# Altium PCB TOP LAYER 2.PcbDoc
Units mm, origin at the board's own origin, x right, y up, seen from the top; angles counter-clockwise.
Board outline 152.4 x 101.6 mm, 2 copper layers (Top Layer, Bottom Layer); 4 components, 12 nets, 21 pads, 0 vias.
Unrouted connection lines stored in the file: 6.
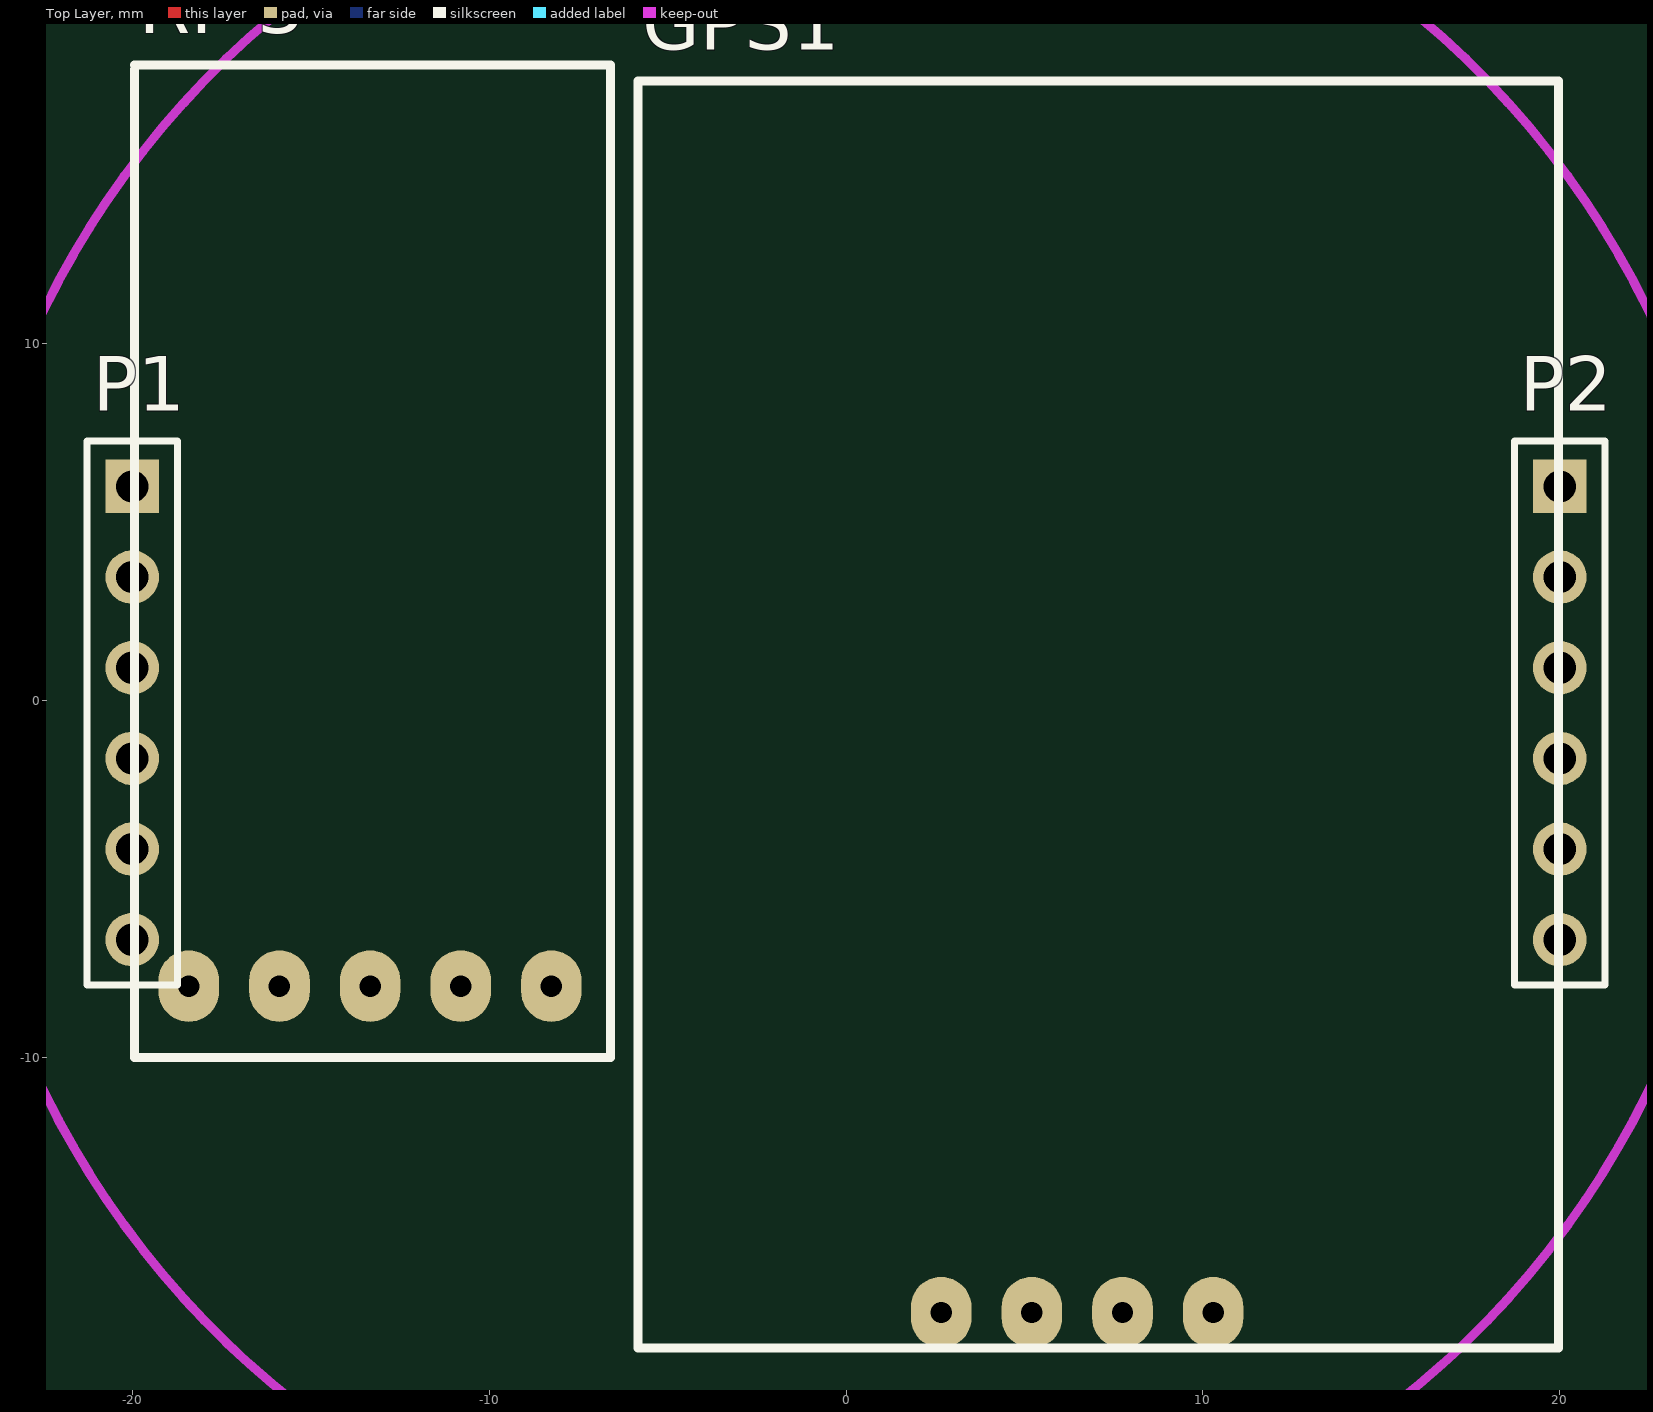
[diagram p0: Top Layer view]
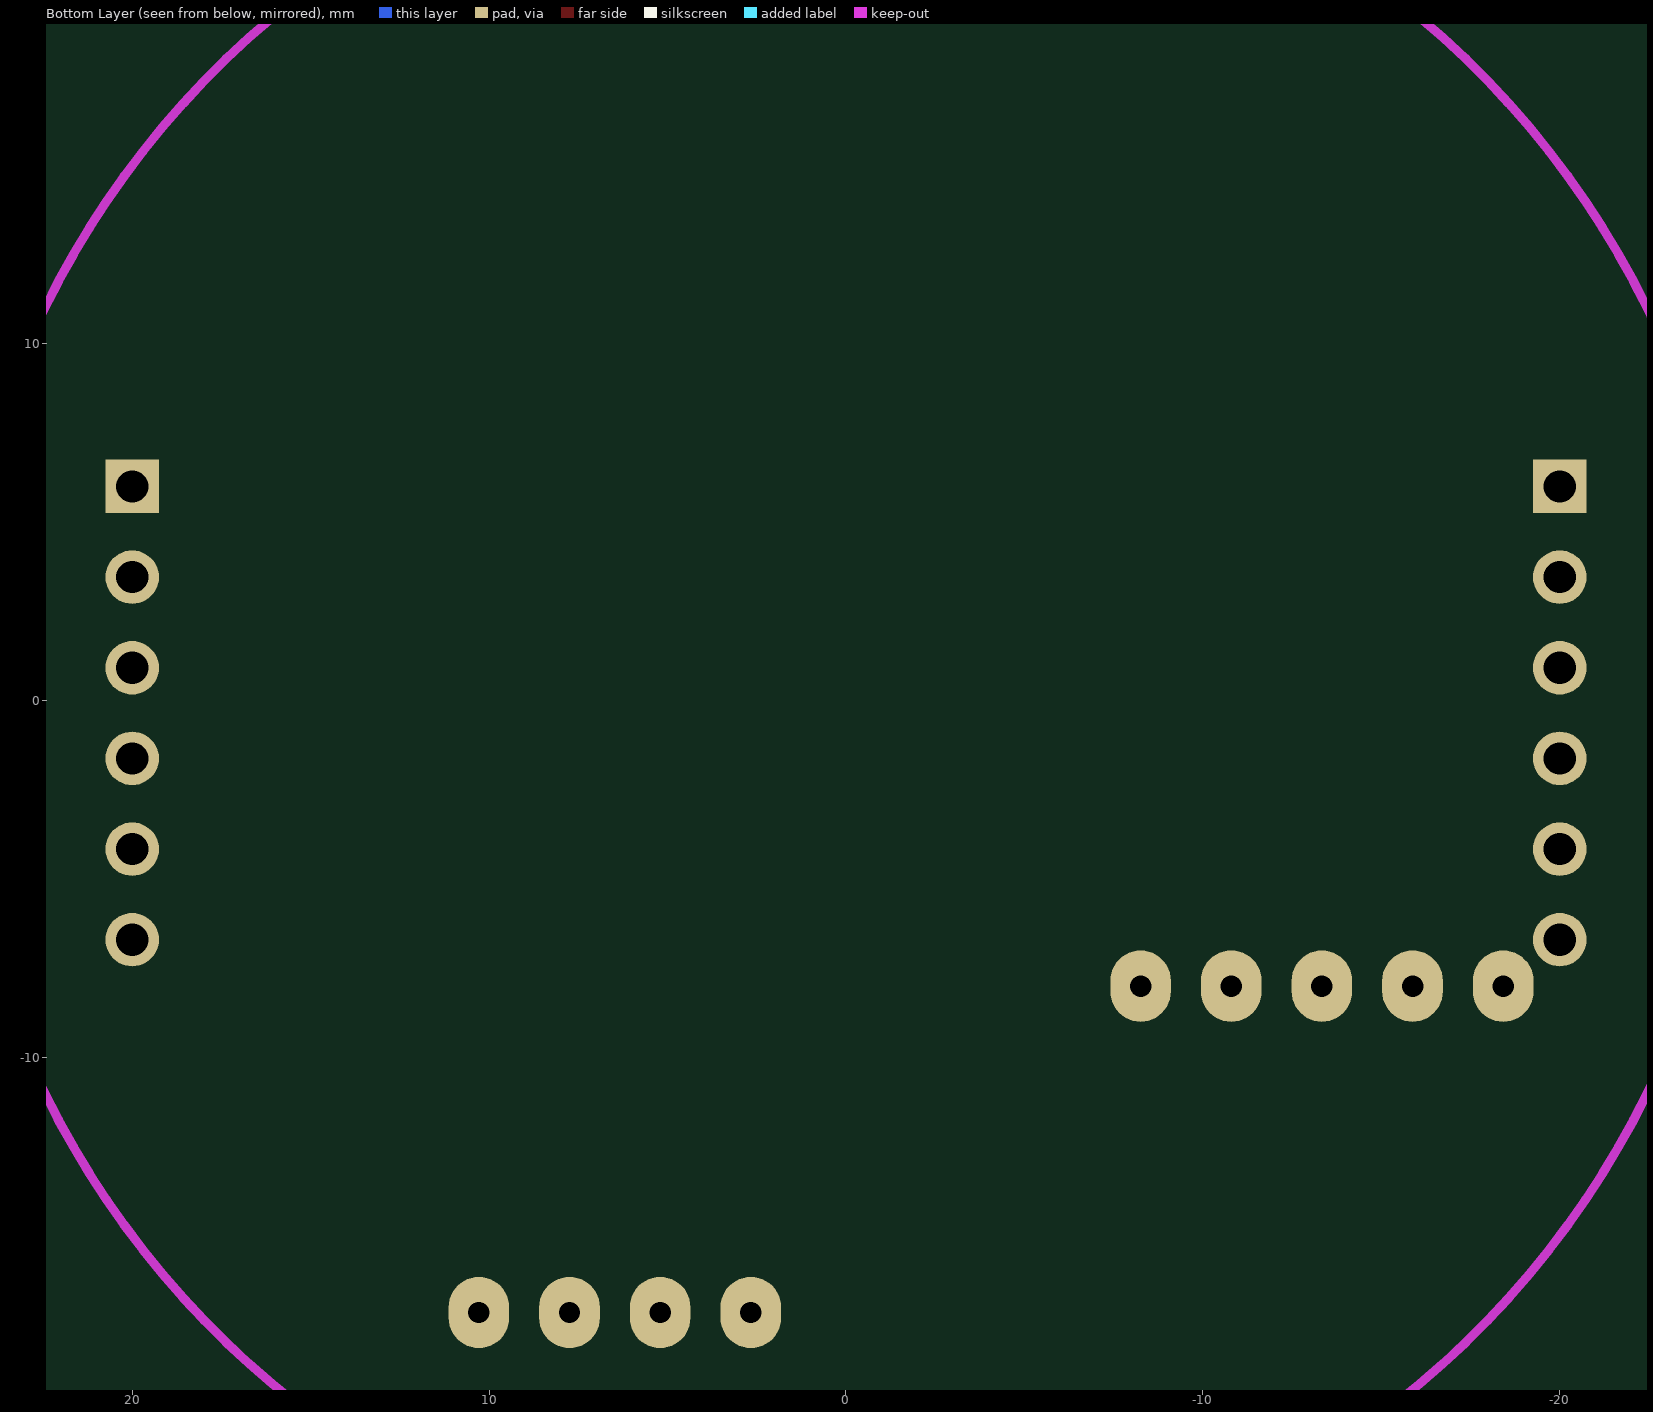
[diagram p1: Bottom Layer view, seen from below]

## Layer stack, top to bottom
Top Solder: solder mask 0.0102, Solder Resist, Dk 3.5
Top Layer: signal copper 0.0356
Dielectric 1: dielectric 0.32, FR-4, Dk 4.8
Bottom Layer: signal copper 0.0356
Bottom Solder: solder mask 0.0102, Solder Resist, Dk 3.5

## Board outline
-75.057,-50.038 77.343,-50.038 77.343,51.562 -75.057,51.562

## Design rules (kind name [scope] priority, off if disabled: settings)
Clearance [All] p1: gap=0.5 ignorepadtopadclearanceinfootprint=FALSE
PolygonConnect [All] p1: connectstyle=Relief reliefconductorwidth=0.254 reliefentries=4 polygonreliefangle="90 Angle" airgapwidth=0.254
RoutingLayers [All] p1: top layer_v5=TRUE bottom layer_v5=FALSE
RoutingVias [All] p1: holewidth=0.711 width=1.27 viastyle="Through Hole" minholewidth=0.711 minwidth=1.27 maxholewidth=0.711 maxwidth=1.27
SolderMaskExpansion [All] p1: expansion=0.102
Width [All] p1: maxlimit=0.7 minlimit=0.254 preferedwidth=0.7 toplayer_minwidth=0.5 bottomlayer_maxwidth=0.254 bottomlayer_prefwidth=0.254 minimp=50.000000 maximp=50.000000 favimp=50.000000
29 further rules are at their usual default settings.

## Components (designator, comment, footprint, x,y, rotation, side; value= is the part's Value field where it differs from the comment)
GPS1 "GPS" GPS -5.833,-18.145 r180 top
P1 "Header 6" HDR1X6 -20,6 r270 top
P2 "Header 6" HDR1X6 20,6 r270 top
"RF 3" "RF" RF -18.415,-10.001 r90 top

## Footprints (in the part's own frame and the unit in brackets; to place one, negate y for a bottom-side part, rotate by r counter-clockwise, add the part's x,y. Pads: shape width x height; smd on the part's side, far side on the other; paste and mask are expansions set on the pad)
GPS [mm]
  oval 1.7x2 hole 0.6: 12(-16.12,-1) 13(-13.58,-1) 14(-11.04,-1) 15(-8.5,-1)
  silkscreen extent -25.8,-35.5 0,0
HDR1X6 [mm] "Connector; Header; 6 Position"
  rect 1.5x1.5 hole 0.9: 1(0,0)
  round 1.5 hole 0.9: 2(2.54,0) 3(5.08,0) 4(7.62,0) 5(10.16,0) 6(12.7,0)
  silkscreen extent -1.27,-1.27 13.97,1.27
RF [mm]
  oval 2x1.7 hole 0.6: 32(2,-10.16) 33(2,-7.62) 34(2,-5.08) 35(2,-2.54) 36(2,0)
  silkscreen extent 0,-11.81 27.81,1.52

## Part data
P1 P2: "Header, 6-Pin", LatestRevisionDate=17-Jul-2002, LatestRevisionNote="Re-released for DXP Platform.", Publisher="Altium Limited"

## Nets (pads, with @x,y where several pads share a name; then routed paths per layer and width w, separated by ;. In a path a pad name is that pad's centre, name@x,y a point inside that pad or via, vN(x,y) a via of type N, cw(c..) or ccw(c..) an arc to the next point about the centre after c; other vN are vias at no path point)
"3.3 volt": GPS1.12 P1.6
"5 volt": "RF 3.32" P1.5
CS: P1.4
GND: "RF 3.33" GPS1.15 P2.1
INT: P1.3
MISO: P2.5
MOSI: P2.6
RX: GPS1.14 P1.1
SCK: P2.4
SCL: P2.2
SDA: P2.3
TX: "RF 3.34" P1.2
pads on no net: "RF 3.35" "RF 3.36" GPS1.13

## Polygon pours and split planes (outlines as drawn)
no net on Top Layer "Top Layer-No Net 1" (solid, pour order 0): 38.608,37.084

## Keep-outs
Keep-Out Layer:
  circle w0.254: c0,0 r25